# EAGLE board Dual VCLFO PANEL (EAGLE 7.7.0)
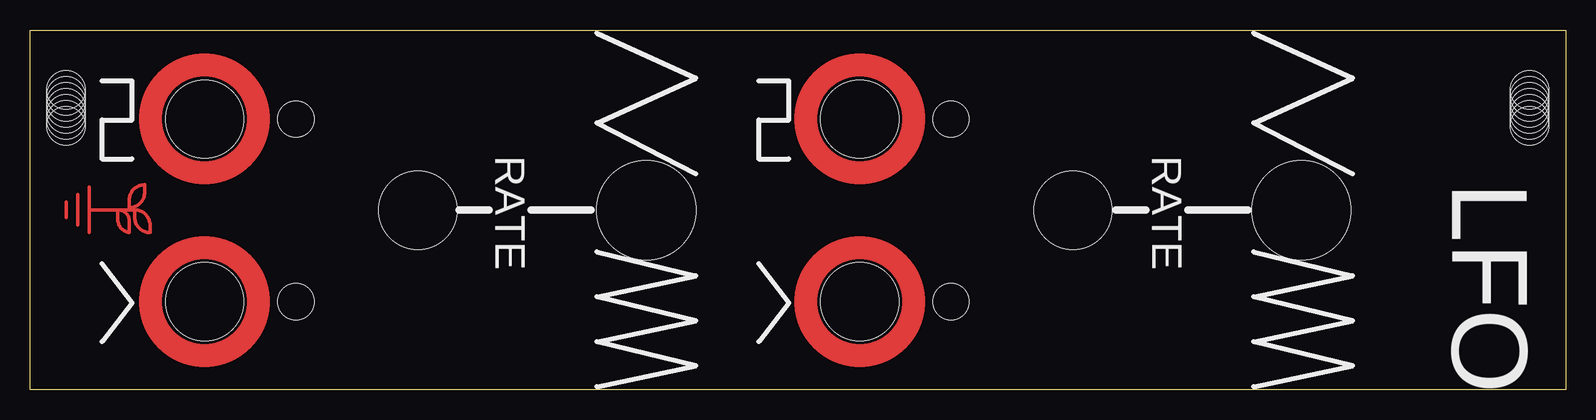
[diagram p0: board, top side]
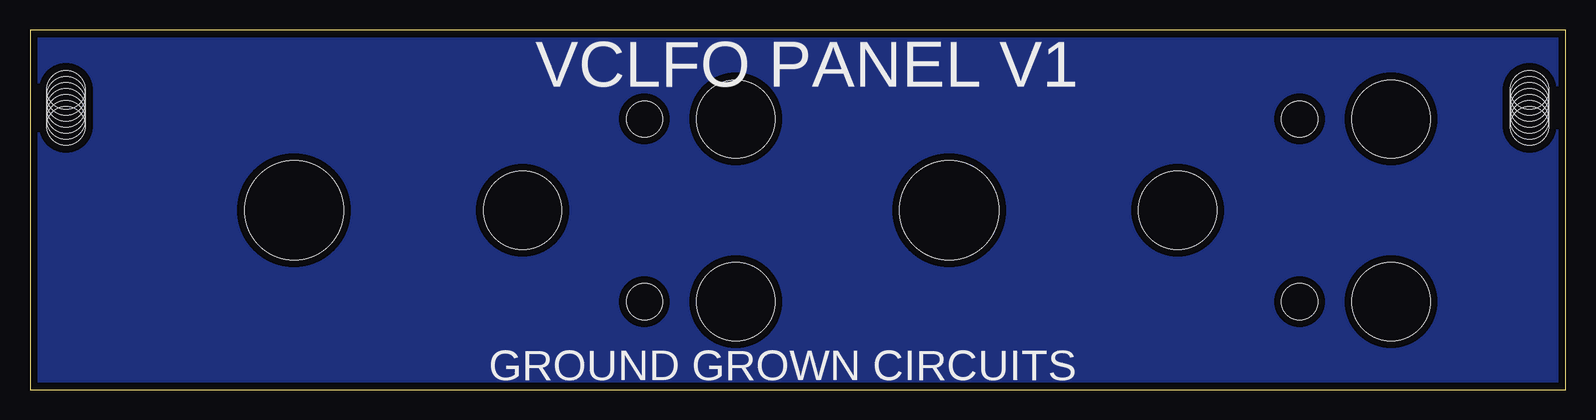
[diagram p1: board, bottom side, seen from below]

Size 128 x 30 mm. Coordinates in mm from the lower left corner, seen from the top.
Outline: 0,0 0,30 128,30 128,0 0,0
Copper layers (1*16): Top 0.035mm / dielectric 1.5mm / Bottom 0.035mm
Design rules "SparkFun": minimum track width 8mil, minimum drill 20mil, track to track 8mil, track to pad 8mil, pad to pad 8mil, via to via 8mil, smd to smd 8mil, copper to edge 8mil, drill to drill 8mil, minimum pad ring 12mil, minimum via ring 10mil, stop-mask expansion 4mil, vias tented up to drill 20mil, thermal gap 10mil

## Footprints (pad centres in the part's own frame; a part is rotated, then mirrored left to right if it is on the bottom)
JACK_DRILL = hole 6.5: 0,0
LED_3MM_DRILL = hole 3: 0,0
MOUNT_DRILL = hole 3.2: 3,8; 3,7.5; 3,7; 3,6.5; 3,6; 3,5.5; 3,5
POT_DRILL = hole 8.25: 0,0
JACK_DRILL_COPPER = hole 6.5: 0,0

## Placement (x,y rotation side)
CV1  [JACK_DRILL]  86.94,14.96 270 top
CV2  [JACK_DRILL]  32.33,14.96 270 top
D3  [LED_3MM_DRILL]  76.78,7.33 90 top
D4  [LED_3MM_DRILL]  76.78,22.57 270 top
D5  [LED_3MM_DRILL]  22.17,7.33 90 top
D6  [LED_3MM_DRILL]  22.17,22.57 270 top
E$1  [MOUNT_DRILL]  128,30 180 top
E$2  [MOUNT_DRILL]  0,30 180 bottom
E$3  [LOGO_SMALL_COPPER]  5,15 270 top
RATE1  B10K  [POT_DRILL]  105.99,14.96 180 top
RATE2  B10K  [POT_DRILL]  51.38,14.96 180 top
SQARE1  [JACK_DRILL_COPPER]  69.16,22.57 0 top
SQUARE2  [JACK_DRILL_COPPER]  14.55,22.57 0 top
TRI1  [JACK_DRILL_COPPER]  69.16,7.33 180 top
TRI2  [JACK_DRILL_COPPER]  14.55,7.33 180 top

## Library data of the parts
CV1 CV2 D3-D6 E$1-E$3 SQARE1 SQUARE2 TRI1 TRI2 = GroundGrownCircuits
RATE1 RATE2 = GroundGrownCircuits; PROD_ID: RES-09177

## Tracks (layer width: path | path; a pad name or v marks a point on that pad's centre or on a via)
S$1
  pour Bottom (isolate 0.61): 0,0 128,0 128,30 0,30

## Text on the board
tPlace: RATE | RATE | LFO
bPlace: VCLFO PANEL V1 | GROUND GROWN CIRCUITS